# Altium PCB HVBoard.PcbDoc
Units mil, origin at the board's own origin, x right, y up, seen from the top; angles counter-clockwise.
Board outline 6265 x 3705 mil, 2 copper layers (Top Layer, Bottom Layer); 128 components, 91 nets, 394 pads, 13 vias.
Unrouted connection lines stored in the file: 237.
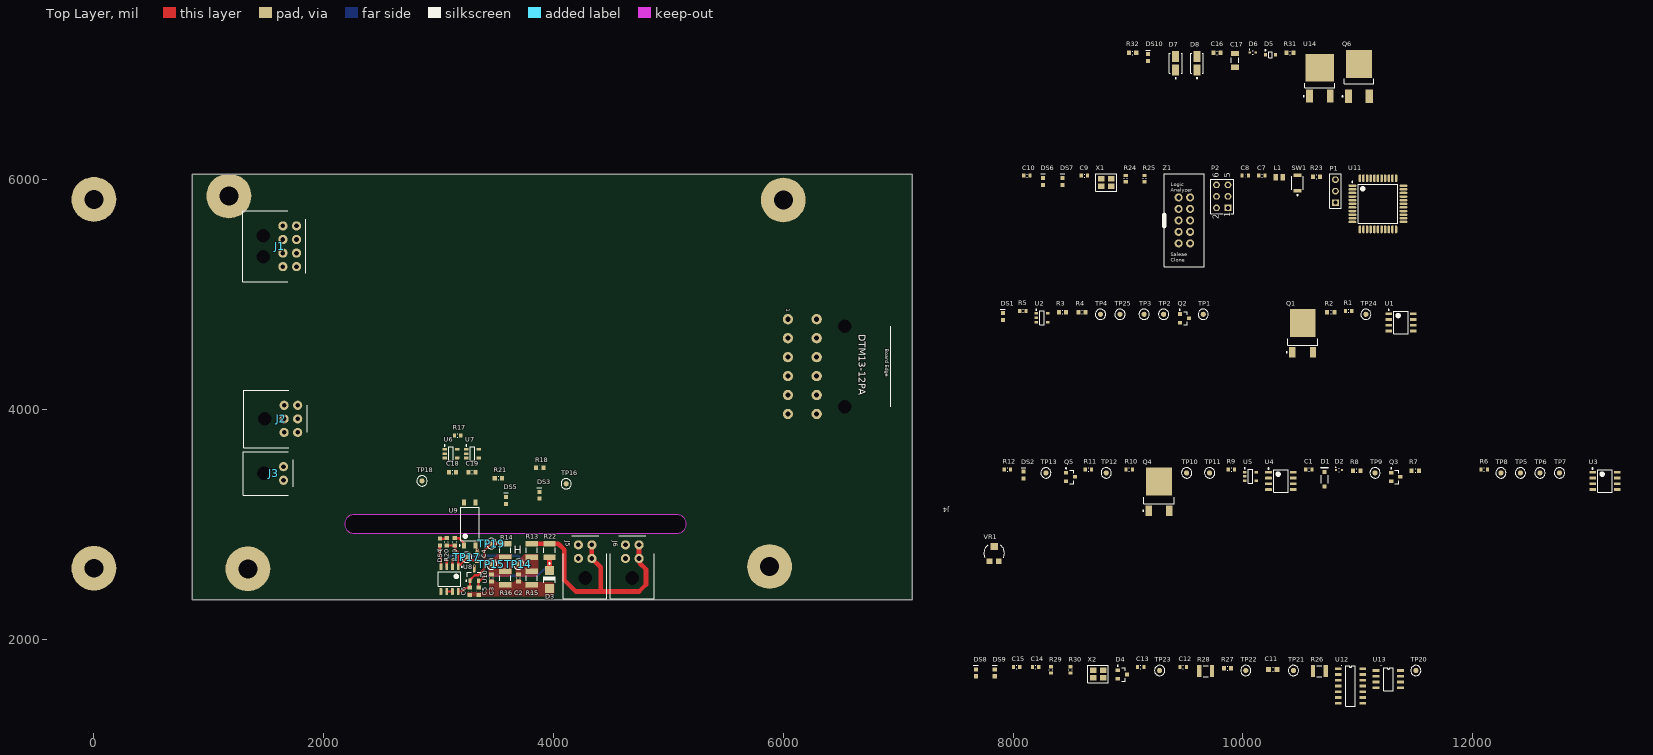
[diagram p0: Top Layer view]
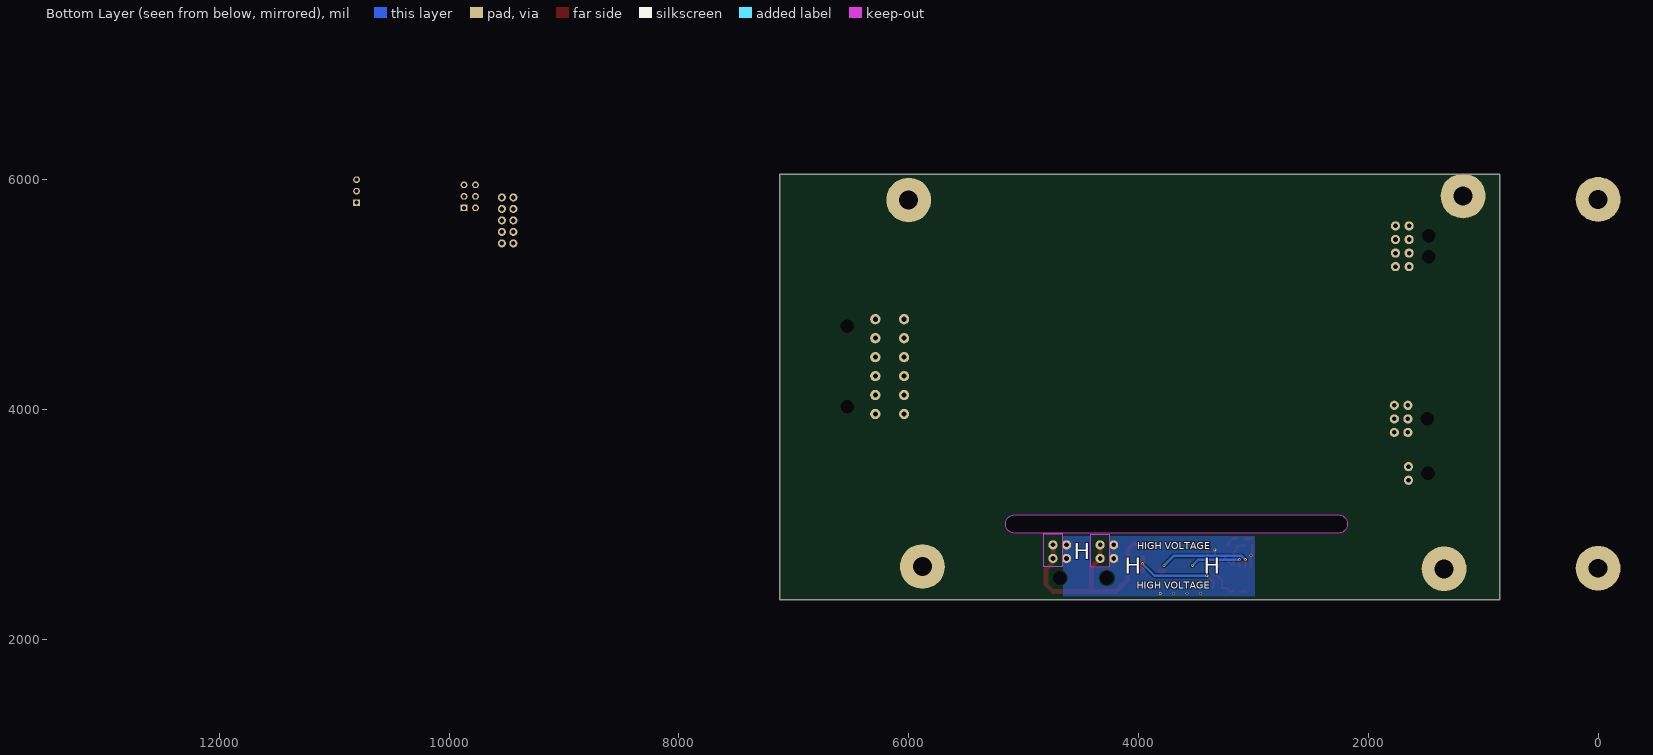
[diagram p1: Bottom Layer view, seen from below]

## Layer stack, top to bottom
Top Solder: solder mask 0.4, Solder Resist, Dk 3.5
Top Layer: signal copper 1.4
Dielectric 1: dielectric 12.6, FR-4, Dk 4.8
Bottom Layer: signal copper 1.4
Bottom Solder: solder mask 0.4, Solder Resist, Dk 3.5

## Board outline
855,2345 855,6050 7120,6050 7120,2345
cut-out: 2261.06,2925 5076.06,2925 ccw(c5076.06,3005) 5076.06,3085 2261.06,3085 ccw(c2261.06,3005)

## Design rules (kind name [scope] priority, off if disabled: settings)
Clearance [All] p1: gap=10 ignorepadtopadclearanceinfootprint=FALSE except(0: Arc-Hole Track-Hole SMDPad-Hole THPad-Hole Via-Hole Fill-Hole Poly-Hole Region-Hole Text-Hole)
PolygonConnect [All] p1: connectstyle=Direct reliefconductorwidth=10 reliefentries=4 polygonreliefangle="90 Angle" airgapwidth=10
RoomDefinition "Power (VCC to 5V)" [InComponentClass('Power (VCC to 5V)')] p1: confinementstyle=ConfineIn formatcopy=TRUE lockcomponents=FALSE outline 8970,6655.04 11155,6655.04 11155,7215.04 8970,7215.04
RoomDefinition Microcontroller [InComponentClass('Microcontroller')] p2: confinementstyle=ConfineIn formatcopy=TRUE lockcomponents=FALSE outline 8065,5231.93 11450,5231.93 11450,6136.93 8065,6136.93
RoomDefinition "Insulation Monitoring Device" [InComponentClass('Insulation Monitoring Device')] p3: confinementstyle=ConfineIn formatcopy=TRUE lockcomponents=FALSE outline 7875,4240 11530,4240 11530,4960 7875,4960
RoomDefinition "Current Sensor (LEM)" [InComponentClass('Current Sensor (LEM)')] p4: confinementstyle=ConfineIn formatcopy=TRUE lockcomponents=FALSE outline 7895,3050 13305,3050 13305,3580 7895,3580
RoomDefinition CANBUS [InComponentClass('CANBUS')] p5: confinementstyle=ConfineIn formatcopy=TRUE lockcomponents=FALSE outline 7640,1410 11620,1410 11620,1860 7640,1860
RoutingVias [All] p1: holewidth=15 width=25 viastyle="Through Hole" minholewidth=15 minwidth=25 maxholewidth=15 maxwidth=25
SolderMaskExpansion [All] p1: expansion=4
Width [All] p1: maxlimit=40 minlimit=10 preferedwidth=20 minimp=50.000000 maximp=50.000000 favimp=50.000000
30 further rules are at their usual default settings.

## Classes and differential pairs
component class "Tractive System Active Light Driving Circuity (TSAL)": C2 C3 C4 C5 C6 C18 C19 D3 DS3 DS4 DS5 R13 R14 R15 R16 R17 R18 R19 R20 R21 R22 TP14 TP15 TP16 TP17 TP18 TP19 U6 U7 U8 U9 U10
component class "Power (VCC to 5V)": C16 C17 D5 D6 D7 D8 DS10 Q6 R31 R32 U14
component class Microcontroller: C7 C8 C9 C10 DS6 DS7 L1 P1 P2 R23 R24 R25 SW1 U11 X1 Z1
component class "Insulation Monitoring Device": DS1 J1 Q1 Q2 R1 R2 R3 R4 R5 TP1 TP2 TP3 TP4 TP24 TP25 U1 U2
component class "Current Sensor (LEM)": C1 D1 D2 DS2 J2 J3 Q3 Q4 Q5 R6 R7 R8 R9 R10 R11 R12 TP5 TP6 TP7 TP8 TP9 TP10 TP11 TP12 TP13 U3 U4 U5 VR1
component class Connector: J4 J5 J6
component class CANBUS: C11 C12 C13 C14 C15 D4 DS8 DS9 R26 R27 R28 R29 R30 TP20 TP21 TP22 TP23 U12 U13 X2

## Components (designator, comment, footprint, x,y, rotation, side; value= is the part's Value field where it differs from the comment)
C1 "CAP 100nF 50V" CAPC0603(1608)100_L 10575,3480 r0 top value=100nF
C2 "CAP 100nF 50V" CAPC0603(1608)100_N 3695,2535 r270 top value=100nF
C3 "CAP 100nF 50V" CAPC0603(1608)100_N 3460,2535 r270 top value=100nF
C4 "CAP 100nF 50V" CAPC0603(1608)100_N 3335,2715.94 r90 top value=100nF
C5 "CAP 100nF 50V" CAPC0603(1608)100_N 3347.4,2420 r270 top value=100nF
C6 "CAP 100nF 50V" CAPC0603(1608)100_N 3272.6,2420 r270 top value=100nF
C7 "CAP 100nF 50V 0603(1608)" CAPC0603(1608)100_L 10165,6036.93 r0 top value=100nF
C8 "CAP 100nF 50V 0603(1608)" CAPC0603(1608)100_L 10020,6036.93 r0 top value=100nF
C9 "CAP 18pF 50V 0603(1608)" CAPC0603(1608)100_L 8620,6036.93 r0 top value=18pF
C10 "CAP 18pF 50V 0603(1608)" CAPC0603(1608)100_L 8120,6036.93 r0 top value=18pF
C11 "CAP 4.7nF 50V 0603(1608)" CAPC0603(1608)100_M 10260,1740 r0 top value=4.7nF
C12 "CAP 100nF 50V 0603(1608)" CAPC0603(1608)100_L 9480,1760 r0 top value=100nF
C13 "CAP 100nF 50V 0603(1608)" CAPC0603(1608)100_L 9110,1760 r0 top value=100nF
C14 "CAP 18pF 50V 0603(1608)" CAPC0603(1608)100_L 8195,1760 r0 top value=18pF
C15 "CAP 18pF 50V 0603(1608)" CAPC0603(1608)100_L 8030,1760 r0 top value=18pF
C16 "CAP 100nF 50V 0603(1608)" CAPC0603(1608)100_N 9775,7105.04 r0 top value=100nF
C17 "CAP 10uF 50V 1206(3216)" CAPC1206(3216)190_N 9930,7040.04 r90 top value=10uF
C18 "CAP 100nF 50V" CAPC0603(1608)100_N 3119.92,3457.4 r0 top value=100nF
C19 "CAP 100nF 50V" CAPC0603(1608)100_N 3289.92,3457.4 r0 top value=100nF
D1 "BZT52C5V1-7-F" DIOD-SOD123_V 10710,3395 r90 top
D2 "ESD5Z5.0T1G" ONSC-SOD-523-2-502-01_V 10835,3475 r0 top
D3 "18V Zener SMA" ONSC-SMA-2-403D-02_F_V 3965,2521.71 r270 top
D4 "NUP2105LT1G" ONSC-SOT-23-3-318-08_V 8950,1695 r0 top
D5 "MM3Z10VT1G" ONSC-SOD-323-2-477-02_V 10240,7090.04 r0 top
D6 "ESD5Z5.0T1G" ONSC-SOD-523-2-502-01_V 10085,7110.04 r0 top
D7 "SMAJ18CA-E3/61" VISH-DO-214AC-2_N 9415,7015.04 r90 top
D8 "SMAJ18CA-E3/61" VISH-DO-214AC-2_N 9600,7015.04 r90 top
DS1 "LED Red 0603" "LED RED 0603" 7910,4810 r90 top
DS2 "LED Red 0603" "LED RED 0603" 8090,3430 r90 top
DS3 "LED Red 0603" "LED RED 0603" 3875.94,3255 r90 top
DS4 "LED Red 0603" "LED RED 0603" 3010,2850 r270 top
DS5 "LED Red 0603" "LED RED 0603" 3585,3210 r90 top
DS6 "LED Orange 0603" "LED ORANGE 0603" 8260,5986.93 r90 top
DS7 "LED Orange 0603" "LED ORANGE 0603" 8430,5986.93 r90 top
DS8 "LED Blue 0603" "LED BLUE 0603" 7675,1710 r90 top
DS9 "LED Blue 0603" "LED BLUE 0603" 7840,1710 r90 top
DS10 "LED Green 0603" "LED GREEN 0603" 9175,7065.04 r90 top
J1 "Microfit 3.0 2x4" Microfit_2X4_R_TH 1475,5422.17 r270 top
J2 "Microfit 3.0 2x3" Microfit_2X3_R_TH 1485,3920 r270 top
J3 "Microfit 3.0 1x2" Microfit_1X2_R_TH 1480,3445 r270 top
J4 "DTM12" DTM13-12PA 6535,4375 r270 top
J5 "Microfit 3.0 2x2" Microfit_2X2_R_TH 4275,2535 r0 top
J6 "Microfit 3.0 2x2" Microfit_2X2_R_TH 4685,2535 r0 top
L1 "LQM21FN100M70L" MURA-IND0805_L 10315,6021.93 r0 top
P1 "Header 3" HDR1X3 10805,5801.93 r90 top
P2 "Header 3X2" HDR2X3 9870,5756.93 r90 top
Q1 "SUD50P06-15-GE3" VSIL-TO-252AA-3_V 10520,4665 r90 top
Q2 "NVR5198NLT1G" ONSC-SOT-23-3-318-08_V 9490,4795 r0 top
Q3 "NVR5198NLT1G" ONSC-SOT-23-3-318-08_V 11330,3415 r0 top
Q4 "SUD50P06-15-GE3" VSIL-TO-252AA-3_V 9270,3285 r90 top
Q5 "NVR5198NLT1G" ONSC-SOT-23-3-318-08_V 8500,3415 r0 top
Q6 "STD35P6LLF6" ONSC-DPAK-3-369C-01_V 11010,6900.04 r90 top
R1 "1K 5% 0603(1608)" RESC0603(1608)_L 10920,4860 r0 top value="1000.00 Ohm"
R2 "2K2 5% 0603(1608)" RESC0603(1608)_N 10765,4850 r0 top value="2200.00 Ohm"
R3 "2K2 5% 0603(1608)" RESC0603(1608)_N 8430,4850 r0 top value="2200.00 Ohm"
R4 "2K2 5% 0603(1608)" RESC0603(1608)_N 8600,4850 r0 top value="2200.00 Ohm"
R5 "1K 5% 0603(1608)" RESC0603(1608)_L 8085,4860 r0 top value="1000.00 Ohm"
R6 "1K 5% 0603(1608)" RESC0603(1608)_L 12100,3480 r0 top value="1000.00 Ohm"
R7 "10K 5% 0603(1608)" RESC0603(1608)_N 11500,3470 r0 top value="10000.00 Ohm"
R8 "4K7 5% 0603(1608)" RESC0603(1608)_N 10990,3470 r0 top value="4700.00 Ohm"
R9 "1K 5% 0603(1608)" RESC0603(1608)_L 9900,3480 r0 top value="1000.00 Ohm"
R10 "1K 5% 0603(1608)" RESC0603(1608)_L 9010,3480 r0 top value="1000.00 Ohm"
R11 "DNP" RESC0603(1608)_L 8655,3480 r0 top
R12 "DNP" RESC0603(1608)_L 7950,3480 r0 top
R13 "9K1 5% 1210(3225)" RESC1210(3225)_N 3810,2775 r90 top value="9100.00 Ohm"
R14 "1K 5% 1210(3225)" RESC1210(3225)_N 3580,2775 r90 top value="1000.00 Ohm"
R15 "1K 5% 1210(3225)" RESC1210(3225)_N 3810,2535 r90 top value="1000.00 Ohm"
R16 "1K 5% 1210(3225)" RESC1210(3225)_N 3580,2535 r90 top value="1000.00 Ohm"
R17 "1K 5% 0603(1608)" RESC0603(1608)_L 3165,3775 r0 top value="1000.00 Ohm"
R18 "1K 5% 0603(1608)" RESC0603(1608)_N 3880,3495 r0 top value="1000.00 Ohm"
R19 "2K2 5% 0603(1608)" RESC0603(1608)_N 3140,2850 r270 top value="2200.00 Ohm"
R20 "1K 5% 0603(1608)" RESC0603(1608)_N 3070,2850 r270 top value="1000.00 Ohm"
R21 "1K 5% 0603(1608)" RESC0603(1608)_N 3520,3405 r0 top value="1000.00 Ohm"
R22 "1K 5% 1210(3225)" RESC1210(3225)_N 3965,2775 r90 top value="1000.00 Ohm"
R23 "10K 5% 0603(1608)" RESC0603(1608)_N 10640,6026.93 r0 top value="10000.00 Ohm"
R24 "1K 5% 0603(1608)" RESC0603(1608)_L 8980,6011.93 r90 top value="1000.00 Ohm"
R25 "1K 5% 0603(1608)" RESC0603(1608)_L 9145,6011.93 r90 top value="1000.00 Ohm"
R26 "60R4 1% 1210(3225)" RESC1210(3225)_L 10665,1725 r0 top value="60.40 Ohm"
R27 "300R 5% 0603(1608)" RESC0603(1608)_N 9865,1750 r0 top value="300.00 Ohm"
R28 "60R4 1% 1210(3225)" RESC1210(3225)_L 9675,1725 r0 top value="60.40 Ohm"
R29 "1K 5% 0603(1608)" RESC0603(1608)_L 8330,1735 r90 top value="1000.00 Ohm"
R30 "1K 5% 0603(1608)" RESC0603(1608)_L 8500,1735 r90 top value="1000.00 Ohm"
R31 "1K 5% 0603(1608)" RESC0603(1608)_N 10410,7105.04 r0 top value="1000.00 Ohm"
R32 "100K 5% 0603(1608)" RESC0603(1608)_N 9040,7105.04 r0 top value="100000.00 Ohm"
SW1 "B3U-1000P" OMRON-B3U-1000_V 10475,5971.93 r90 top
TP1 "TestPoint_SMD" TestPointSMD 9655,4830 r0 top
TP2 "TestPoint_SMD" TestPointSMD 9310,4830 r0 top
TP3 "TestPoint_SMD" TestPointSMD 9140,4830 r0 top
TP4 "TestPoint_SMD" TestPointSMD 8760,4830 r0 top
TP5 "TestPoint_SMD" TestPointSMD 12415,3450 r0 top
TP6 "TestPoint_SMD" TestPointSMD 12585,3450 r0 top
TP7 "TestPoint_SMD" TestPointSMD 12755,3450 r0 top
TP8 "TestPoint_SMD" TestPointSMD 12245,3450 r0 top
TP9 "TestPoint_SMD" TestPointSMD 11150,3450 r0 top
TP10 "TestPoint_SMD" TestPointSMD 9510,3450 r0 top
TP11 "TestPoint_SMD" TestPointSMD 9710,3450 r0 top
TP12 "TestPoint_SMD" TestPointSMD 8810,3450 r0 top
TP13 "TestPoint_SMD" TestPointSMD 8285,3450 r0 top
TP14 "TestPoint_SMD" TestPointSMD 3695,2655 r270 top
TP15 "TestPoint_SMD" TestPointSMD 3460,2655 r0 top
TP16 "TestPoint_SMD" TestPointSMD 4110,3355 r0 top
TP17 "TestPoint_SMD" TestPointSMD 3245,2715.94 r0 top
TP18 "TestPoint_SMD" TestPointSMD 2855,3380 r0 top
TP19 "TestPoint_SMD" TestPointSMD 3460,2835 r0 top
TP20 "TestPoint_SMD" TestPointSMD 11505,1730 r0 top
TP21 "TestPoint_SMD" TestPointSMD 10440,1730 r0 top
TP22 "TestPoint_SMD" TestPointSMD 10025,1730 r0 top
TP23 "TestPoint_SMD" TestPointSMD 9275,1730 r0 top
TP24 "TestPoint_SMD" TestPointSMD 11070,4830 r0 top
TP25 "TestPoint_SMD" TestPointSMD 8930,4830 r0 top
U1 "LM358AM" D0008A_N 11375,4760 r0 top
U2 "SN74LVC1G17DBVR" DBV0005A_L 8250,4800 r0 top
U3 "LM358AM" D0008A_N 13150,3380 r0 top
U4 "LM358AM" D0008A_N 10330,3380 r0 top
U5 "SN74LVC1G17DBVR" DBV0005A_L 10065,3420 r0 top
U6 "SN74LVC1G17DBVR" DBV0005A_N 3105.87,3617.4 r0 top
U7 "SN74LVC1G17DBVR" DBV0005A_N 3295.87,3617.4 r0 top
U8 "LM358AM" D0008A_N 3095,2525 r270 top
U9 "TCLT1000" VISH-SOP4L-4_V 3272.6,3005 r90 top
U10 "LM3480IM3-12" DBZ0003A_N 3310,2557.56 r90 top
U11 "ATmega1284P-AU" 44A_N 11175,5791.93 r0 top
U12 "MCP2518FD" "MCP2517FD SOIC" 10830,1745 r0 top
U13 "MCP2561" "MCP2561 SOIC" 11160,1730 r0 top
U14 "L78M05CDT" STM-TO252-3_A_V 10670,6885.04 r90 top
VR1 "4.7k Variable Resistor" VG039NCHXTB472 7835,2750 r0 top
X1 "XTAL_16Mz_3.2mm*2.5mm" 3.2mm*2.5mm 8810,5976.93 r0 top
X2 "XTAL_20Mz_3.2mm*2.5mm" 3.2mm*2.5mm 8740,1700 r0 top
Z1 "LogicAnalyzerBreakOut" LogicAnalyzer 9490,5646.93 r0 top

## Footprints (in the part's own frame and the unit in brackets; to place one, negate y for a bottom-side part, rotate by r counter-clockwise, add the part's x,y. Pads: shape width x height; smd on the part's side, far side on the other; paste and mask are expansions set on the pad)
3.2mm*2.5mm [mm]
  rect 1.4x1.2 smd: 1(-1.1,-0.85) 2(1.1,-0.85) 3(1.1,0.85) 4(-1.1,0.85)
  silkscreen extent -2.29,-1.91 2.29,1.91, body extent -1.6,-1.25 1.6,1.25, height 0.8
44A_N [mm] "Thin QFP, 44-Leads, Body 10x10mm, Pitch 0.8mm, IPC Medium Density"
  oval 1.75x0.55 smd: 1(-5.65,4) 2(-5.65,3.2) 3(-5.65,2.4) 4(-5.65,1.6) 5(-5.65,0.8) 6(-5.65,0) 7(-5.65,-0.8) 8(-5.65,-1.6) 9(-5.65,-2.4) 10(-5.65,-3.2) 11(-5.65,-4) 23(5.65,-4) 24(5.65,-3.2) 25(5.65,-2.4) 26(5.65,-1.6) 27(5.65,-0.8) 28(5.65,0) 29(5.65,0.8) 30(5.65,1.6) 31(5.65,2.4) 32(5.65,3.2) 33(5.65,4)
  oval 0.55x1.75 smd: 12(-4,-5.65) 13(-3.2,-5.65) 14(-2.4,-5.65) 15(-1.6,-5.65) 16(-0.8,-5.65) 17(0,-5.65) 18(0.8,-5.65) 19(1.6,-5.65) 20(2.4,-5.65) 21(3.2,-5.65) 22(4,-5.65) 34(4,5.65) 35(3.2,5.65) 36(2.4,5.65) 37(1.6,5.65) 38(0.8,5.65) 39(0,5.65) 40(-0.8,5.65) 41(-1.6,5.65) 42(-2.4,5.65) 43(-3.2,5.65) 44(-4,5.65)
  silkscreen extent -5.77,-4.35 4.35,4.95, body extent -5,-5 5,5, height 1.2
CAPC0603(1608)100_L [mm] "Chip Capacitor, Body 1.6x0.8mm, Height 1.0mm, IPC High Density"
  rect 0.7x0.9 smd: 1(-0.7,0) 2(0.7,0)
  silkscreen extent -0.05,-0.35 0.05,0.35, body extent -0.87,-0.47 0.88,0.48, height 1
CAPC0603(1608)100_M [mm] "Chip Capacitor, Body 1.6x0.8mm, Height 1.0mm, IPC Low Density"
  rect 1.1x1.1 smd: 1(-0.9,0) 2(0.9,0)
  silkscreen extent -0.05,-0.45 0.05,0.45, body extent -0.87,-0.47 0.88,0.48, height 1
CAPC0603(1608)100_N [mm] "Chip Capacitor, Body 1.6x0.8mm, Height 1.0mm, IPC Medium Density"
  rect 0.9x1 smd: 1(-0.8,0) 2(0.8,0)
  silkscreen extent -0.05,-0.4 0.05,0.4, body extent -0.87,-0.48 0.88,0.47, height 1
CAPC1206(3216)190_N [mm] "Chip Capacitor, Body 3.2x1.6mm, Height 1.9mm, IPC Medium Density"
  rect 1.15x1.8 smd: 1(-1.5,0) 2(1.5,0)
  silkscreen extent -0.55,-0.8 0.55,0.8, body extent -1.7,-0.9 1.7,0.9, height 1.9
D0008A_N [mm] "SOIC, 8-Leads, Body 5x4mm, Pitch 1.27mm, IPC Medium Density"
  rrect17% 1.45x0.6 smd: 1(-2.725,1.905) 2(-2.725,0.635) 3(-2.725,-0.635) 4(-2.725,-1.905) 5(2.725,-1.905) 6(2.725,-0.635) 7(2.725,0.635) 8(2.725,1.905)
  silkscreen extent -2.85,-2.5 1.6,2.88, body extent -3,-2.45 3,2.45, height 1.63
DBV0005A_L [mm] "SOT23, 5-Leads, Body 3.05x1.75mm, Pitch 0.95mm, IPC High Density"
  rrect18% 0.8x0.55 smd: 1(-1.275,0.95) 2(-1.275,0) 3(-1.275,-0.95) 4(1.275,-0.95) 5(1.275,0.95)
  silkscreen extent -1.4,-1.55 0.5,1.9, body extent -1.42,-1.46 1.42,1.46, height 1.08
DBV0005A_N [mm] "SOT23, 5-Leads, Body 3.05x1.75mm, Pitch 0.95mm, IPC Medium Density"
  rrect17% 1x0.6 smd: 1(-1.375,0.95) 2(-1.375,0) 3(-1.375,-0.95) 4(1.375,-0.95) 5(1.375,0.95)
  silkscreen extent -1.5,-1.55 0.5,1.92, body extent -1.42,-1.46 1.42,1.46, height 1.08
DBZ0003A_N [mm] "SOT23, 3-Leads, Body 3.04x1.4mm, Pitch 0.95mm, IPC Medium Density"
  rrect17% 1x0.6 smd: 1(-1.2,0.95) 2(-1.2,-0.95) 3(1.2,0)
  silkscreen extent -1.32,-1.5 0.7,1.92, body extent -1.26,-1.46 1.26,1.46, height 0.96
DIOD-SOD123_V [mm] "SMD, 2-Leads, Body 2.7x1.55mm"
  rect 0.9x0.95 smd: 1(-1.575,0) 2(1.575,0)
  silkscreen extent -0.86,-0.77 2.52,0.77, body extent -1.35,-0.77 1.35,0.77, height 1.41
DTM13-12PA [mil]
  round 90 hole 45: 1(412.5,-495) 2(247.5,-495) 3(82.5,-495) 4(-82.5,-495) 5(-247.5,-495) 6(-412.5,-495) 7(-412.5,-245) 8(-247.5,-245) 9(-82.5,-245) 10(82.5,-245) 11(247.5,-245) 12(412.5,-245)
  round 0 hole 118.11 mask+39.37: NC(-350,0) NC(350,0)
  silkscreen extent -350,400 350,400, body extent -1200,-590 1200,914, height 1350
HDR1X3 [mm] "Connector; Header; 3 Position"
  rect 1.5x1.5 hole 0.9: 1(0,0)
  round 1.5 hole 0.9: 2(2.54,0) 3(5.08,0)
  silkscreen extent -1.27,-1.27 6.35,1.27
HDR2X3 [mm] "Connector; Header; 3x2 Position"
  rect 1.5x1.5 hole 0.9: 1(0,0)
  round 1.5 hole 0.9: 2(0,2.54) 3(2.54,0) 4(2.54,2.54) 5(5.08,0) 6(5.08,2.54)
  silkscreen extent -1.27,-1.27 6.35,3.81
"LED BLUE 0603" [mil]
  rect 35x35 smd: 1(-30,0) 2(30,0)
  silkscreen extent 65,-20 65,20, body extent -40,-20 40,20, height 30
"LED GREEN 0603" [mil]
  rect 35x35 smd: 1(-30,0) 2(30,0)
  silkscreen extent 65,-20 65,20, body extent -40,-20 40,20, height 30
"LED ORANGE 0603" [mil]
  rect 35x35 smd: 1(-30,0) 2(30,0)
  silkscreen extent 65,-20 65,20, body extent -40,-20 40,20, height 30
"LED RED 0603" [mil]
  rect 35x35 smd: 1(-30,0) 2(30,0)
  silkscreen extent 65,-20 65,20, body extent -40,-20 40,20, height 30
LogicAnalyzer [mil]
  round 70 hole 40: 1(-50,200) 2(50,200) 3(-50,100) 4(50,100) 5(-50,0) 6(50,0) 7(-50,-100) 8(50,-100) 9(-50,-200) 10(50,-200)
  silkscreen extent -175,-405 175,405, body extent -175,-404 175,404, height 359
"MCP2517FD SOIC" [mm]
  rect 1.5x0.6 smd: 1(0,0) 2(0,-1.27) 3(0,-2.54) 4(0,-3.81) 5(0,-5.08) 6(0,-6.35) 7(0,-7.62) 8(5.4,-7.62) 9(5.4,-6.35) 10(5.4,-5.08) 11(5.4,-3.81) 12(5.4,-2.54) 13(5.4,-1.27) 14(5.4,0)
  silkscreen extent 0.64,-8.25 3.76,0.76, body extent 0.74,-8.13 4.64,0.52, height 1.74
"MCP2561 SOIC" [mm]
  rect 1.55x0.6 smd: 1(0,0) 2(0,-1.27) 3(0,-2.54) 4(0,-3.81) 5(5.4,-3.81) 6(5.4,-2.54) 7(5.4,-1.27) 8(5.4,0)
  silkscreen extent 1.02,-4.44 3.74,1.14, body extent 0.51,-4.38 4.64,0.52, height 1.65
Microfit_1X2_R_TH [mil]
  round 80 hole 40: 1(59.06,170) 2(-59.06,170)
  round 0 hole 118.11 unplated mask+10: NC(0,0)
  silkscreen extent -190,-180 190,255, body extent -190,-180 190,210, height 223
Microfit_2X2_R_TH [mil]
  round 80 hole 40: 1(59.06,170) 2(-59.06,170) 3(59.06,288.19) 4(-59.06,288.19)
  round 0 hole 118.11 unplated mask+10: NC(0,0)
  silkscreen extent -190,-180 190,370, body extent -200,-180 200,302, height 350
Microfit_2X3_R_TH [mil]
  round 80 hole 40: 1(118.11,170) 2(0,170) 3(-118.11,170) 4(118.11,288.19) 5(0,288.19) 6(-118.11,288.19)
  round 0 hole 118.11 unplated mask+10: NC(0,0)
  silkscreen extent -250,-180 250,370, body extent -259,-180 259,302, height 350
Microfit_2X4_R_TH [mil]
  round 80 hole 40: 1(177.17,170) 2(59.06,170) 3(-59.06,170) 4(-177.17,170) 5(177.17,288.19) 6(59.06,288.19) 7(-59.06,288.19) 8(-177.17,288.19)
  round 0 hole 118.11 unplated mask+10: NC(-92.52,0) NC(92.52,0)
  silkscreen extent -310,-180 310,370, body extent -318,-180 318,302, height 350
MURA-IND0805_L [mm] "Chip Inductor, 2-Leads, Body 2.2x1.45mm, IPC High Density"
  rect 0.99x1.39 smd: 1(-0.755,0) 2(0.755,0)
  body extent -1.1,-0.72 1.1,0.72, height 1.45
OMRON-B3U-1000_V [mm] "SMD, 2-Leads, Body 3x2.5mm"
  rect 0.8x1.7 smd: 1(-1.7,0) 2(1.7,0)
  silkscreen extent -2.77,-1.25 1.5,1.25, body extent -1.5,-1.25 1.5,1.25, height 1.75
ONSC-DPAK-3-369C-01_V [mm] "DPAK, 3-Leads, Body 6.54x6.095mm, Pitch 2.29mm"
  rect 3x1.6 smd: 1(-4.4,2.29) 3(-4.4,-2.29)
  rect 6.2x5.8 smd: 4(2.8,0)
  silkscreen extent -4.52,-3.27 -0.45,3.76, body extent -1.6,-3.27 4.49,3.27, height 2.38
ONSC-SMA-2-403D-02_F_V [mm] "Molded, 2-Leads, Body 4.32x2.6mm"
  rect 2x2 smd: 1(-2,0) 2(2,0)
  silkscreen extent -3.67,-1.3 0.74,1.3, body extent -2.16,-1.3 2.16,1.3, height 2.2
ONSC-SOD-323-2-477-02_V [mm] "SOD, 2-Leads, Body 1.7x1.25mm"
  rect 0.63x0.83 smd: 1(-1.115,0) 2(1.115,0)
  silkscreen extent -1.24,-0.67 0.4,1.09, body extent -0.85,-0.63 0.85,0.63, height 1.06
ONSC-SOD-523-2-502-01_V [mm] "SOD, 2-Leads, Body 1.2x0.8mm"
  rect 0.48x0.4 smd: 1(-0.66,0) 2(0.66,0)
  silkscreen extent -0.75,-0.4 0.07,0.65, body extent -0.6,-0.4 0.6,0.4, height 0.7
ONSC-SOT-23-3-318-08_V [mm] "SOT23, 3-Leads, Body 2.92x1.3mm, Pitch 0.95mm"
  rect 0.9x0.8 smd: 1(-1,0.95) 2(-1,-0.95) 3(1,0)
  silkscreen extent -1.12,-1.46 0.65,2.02, body extent -0.65,-1.46 0.65,1.46, height 1.11
RESC0603(1608)_L [mm] "Chip Resistor, Body 1.6x0.8mm, IPC High Density"
  rect 0.7x0.9 smd: 1(-0.7,0) 2(0.7,0)
  silkscreen extent -0.05,-0.35 0.05,0.35, body extent -0.85,-0.47 0.85,0.47, height 0.6
RESC0603(1608)_N [mm] "Chip Resistor, Body 1.6x0.8mm, IPC Medium Density"
  rect 0.9x1 smd: 1(-0.8,0) 2(0.8,0)
  silkscreen extent -0.05,-0.4 0.05,0.4, body extent -0.85,-0.47 0.85,0.47, height 0.6
RESC1210(3225)_L [mm] "Chip Resistor, Body 3.2x2.5mm, IPC High Density"
  rect 0.95x2.6 smd: 1(-1.4,0) 2(1.4,0)
  silkscreen extent -0.55,-1.2 0.55,1.2, body extent -1.7,-1.35 1.7,1.35, height 0.71
RESC1210(3225)_N [mm] "Chip Resistor, Body 3.2x2.5mm, IPC Medium Density"
  rect 1.15x2.7 smd: 1(-1.5,0) 2(1.5,0)
  silkscreen extent -0.55,-1.25 0.55,1.25, body extent -1.7,-1.35 1.7,1.35, height 0.71
STM-TO252-3_A_V [mm] "D-PAK, 3-Leads, Body 6.20x6.60mm, Pitch 2.28mm"
  rect 2.8x1.5 smd: 1(-3.95,2.28) 3(-3.95,-2.28)
  rect 6.1x6.3 smd: 4(2.3,0)
  silkscreen extent -4.07,-3.3 -1.15,3.7, body extent -3.37,-3.3 6.35,3.3, height 2.43
TestPointSMD [mil]
  round 45 smd: 1(0,0)
  silkscreen extent -45,-45 45,45
VG039NCHXTB472 [mil] "VG039NCHXTB472"
  rect 50x50 smd: 1(40,-70) 3(-40,-70)
  rect 65x60 smd: 2(0,60)
  silkscreen extent -90,-38 90,69, body extent -60,-75 60,75, height 50
VISH-DO-214AC-2_N [mm] "DO-214AC, 2-Leads, Body 4.5x2.79mm, IPC Medium Density"
  rect 2.4x1.55 smd: 1(-1.525,0) 2(1.525,0)
  silkscreen extent -3.4,-1.4 2.25,1.4, body extent -2.25,-1.4 2.25,1.39, height 2.29
VISH-SOP4L-4_V [mm] "SOP, 4-Leads, Body 4.1x7.7mm, Pitch 2.54mm"
  rect 1.3x0.9 smd: 1(-4.75,1.27) 2(-4.75,-1.27) 3(4.75,-1.27) 4(4.75,1.27)
  silkscreen extent -4.87,-2.05 3.7,2.39, body extent -5.07,-2.05 5.07,2.05, height 2.3
VSIL-TO-252AA-3_V [mm] "DPAK, 3-Leads, Body 6.73x6.22mm, Pitch 2.28mm"
  rect 2.286x1.397 smd: 1(-4.185,2.28) 3(-4.185,-2.28)
  rect 6.18x5.69 smd: 2(2.25,0)
  silkscreen extent -4.32,-3.35 -1.24,3.65, body extent -2.8,-3.37 3.42,3.37, height 2.38

## Part data
C1 C2 C3 C4 C5 C6 C7 C8 C12 C13 C16 C18 C19: library part CMP-1035-02591-1, "CAP 100nF 50V ±5% 0603 (1608 Metric) Thickness 1mm SMD", Case-EIA=0603, Case-Metric=1608, Rated Voltage="50 V", Tolerance=±5%, Max Thickness="1 mm", Technology=SMT
C9 C10 C14 C15: library part CMP-1035-00748-1, "CAP 18pF 50V ±1% 0603 (1608 Metric) Thickness 1mm SMD", Case-EIA=0603, Case-Metric=1608, Rated Voltage="50 V", Tolerance=±1%, Max Thickness="1 mm", Technology=SMT
C11: library part CMP-1035-02202-1, "CAP 4.7nF 50V ±5% 0603 (1608 Metric) Thickness 1mm SMD", Case-EIA=0603, Case-Metric=1608, Rated Voltage="50 V", Tolerance=±5%, Max Thickness="1 mm", Technology=SMT
C17: library part CMP-1037-04982-1, "CAP 10uF 50V ±10% 1206 (3216 Metric) Thickness 1.9mm SMD", Case-EIA=1206, Case-Metric=3216, Rated Voltage="50 V", Tolerance=±10%, Max Thickness="1.9 mm", Technology=SMT
D1: library part CMP-2000-05976-1, "Surface Mount Zener Diode, 5.1 V, -65 to 150 degC, 2-Pin SMD (SOD-123), RoHS, Tape and Reel", Ir - Reverse Current=2uA, Manufacturer=DiodesIncorporated, Maximum Operating Temperature=+150C, Minimum Operating Temperature=-65C, Package / Case=SOD-123, Package Description="2-Pin Surface Mount Device, Body 2.7 x 1.55 mm", Package Reference=SOD123, Pd - Power Dissipation=500mW, Voltage Temperature Coefficient=-0.75mV/C, Voltage Tolerance=6%, Vz - Zener Voltage=5.1V, Zener Current=5mA, Brand=DiodesIncorporated, Configuration=Single, Datasheet URL=http://www.diodes.com/_files/datasheets/ds18004.pdf, Datasheet Version="Rev. 37-2, 09/2012", Factory Pack Quantity=3000, Height=1.35mm, Length=2.85mm, Manufacturer URL=http://www.diodes.com/, Mounting Style=SMD/SMT, Mounting Technology=SurfaceMount, Packaging=Reel, Product Category=ZenerDiodes, RoHS=True, Series=BZT52C5, Termination Style=SMD/SMT, Unit Weight=0.000353oz, Width=1.7mm, Zz - Zener Impedance=60Ohms
D2 D6: library part CMP-1063-00102-1, "Transient Voltage Suppressor, Micro-Packaged Diode for ESD Protection, 2-Pin SOD-523, Pb-Free, Tape and Reel", Manufacturer="On Semiconductor", ComponentLink1Description="Manufacturer URL", ComponentLink1URL=http://www.onsemi.com/, ComponentLink2Description=Datasheet, ComponentLink2URL=http://www.onsemi.cn/pub_link/Collateral/ESD5Z2.5T1-D.PDF, ComponentLink3Description="Package Specification", ComponentLink3URL=http://www.onsemi.com/pub_link/Collateral/502-01.PDF, DatasheetVersion="Rev. 10", Direction=Unidirectional, IR Max (uA)=0.05, Mounting Technology="Surface Mount", Number of Lines=1, PackageDescription="2-Pin SOD, Body 1.2 x 0.8 mm", PackageReference=SOD-523-2-502-01, PackageVersion="Rev. E, 09/2010", Packing="Tape and Reel", PartNumber=ESD5Z5.0T1G, PPK Max (W)=174, RoHS=Pb-Free, V(BR) Min (V)=6.2, VRWM Max (V)=5
D3: library part CMP-1060-00118-1, "1.5 W Zener Voltage Regulator, 2-Pin SMA, Pb-Free, Tape and Reel", Manufacturer="On Semiconductor", PartNumber=1SMA5931BT3G, ComponentLink1Description="Manufacturer URL", ComponentLink1URL=http://www.onsemi.com/, ComponentLink2Description=Datasheet, ComponentLink2URL=http://www.onsemi.com/pub_link/Collateral/1SMA5913BT3-D.PDF, ComponentLink3Description="Package Specification", ComponentLink3URL=http://www.onsemi.com/pub_link/Collateral/1SMA5913BT3-D.PDF, DatasheetVersion="Rev. 8", Mounting Technology="Surface Mount", PackageDescription="2-Pin Small Molded Package, J-Bend Lead, Body 2.605 x 4.315 mm", PackageReference=SMA-2-403D-02_F, PackageVersion="Rev. F, 11/2008", Packing="Tape and Reel", RoHS=Pb-Free, VZ Typ (V)=18
D4: library part CMP-1063-00164-1, "Dual Line CAN Bus Protector, 3-Pin SOT-23, Pb-Free, Tape and Reel", Manufacturer="On Semiconductor", C Max (pF)=30, ComponentLink1Description="Manufacturer URL", ComponentLink1URL=http://www.onsemi.com/, ComponentLink2Description=Datasheet, ComponentLink2URL=http://www.onsemi.cn/pub_link/Collateral/NUP2105L-D.PDF, ComponentLink3Description="Package Specification", ComponentLink3URL=http://www.onsemi.cn/pub_link/Collateral/318-08.PDF, DatasheetVersion="Rev. 5", Direction=Bidirectional, IR Max (uA)=0.1, Mounting Technology="Surface Mount", Number of Lines=2, PackageDescription="3-Pin Small Outline Transistor, Body 2.92 x 1.3 mm, Pitch 0.95 mm", PackageReference=SOT-23-3-318-08, PackageVersion="Rev. AP, 11/2009", Packing="Tape and Reel", PartNumber=NUP2105LT1G, PPK Max (W)=350, RoHS=Pb-Free, V(BR) Min (V)=26.2
D5: library part CMP-1060-00715-1, "Zener Voltage Regulator, 300 mW, 2-Pin SOD-323, Pb-Free, Tape and Reel", Manufacturer="On Semiconductor", ComponentLink1Description="Manufacturer URL", ComponentLink1URL=http://www.onsemi.com/, ComponentLink2Description=Datasheet, ComponentLink2URL=http://www.onsemi.cn/pub_link/Collateral/MM3Z2V4T1-D.PDF, ComponentLink3Description="Package Specification", ComponentLink3URL=http://www.onsemi.com/pub_link/Collateral/477-02.PDF.1, DatasheetVersion="Rev. 9", Mounting Technology="Surface Mount", PackageDescription="2-Pin SOD, Body 1.7 x 1.25 mm", PackageReference=SOD-323-2-477-02, PackageVersion="Rev. H, 03/2007", Packing="Tape and Reel", PartNumber=MM3Z10VT1G, P Max (W)=0.3, RoHS=Pb-Free, VZ Typ (V)=10
D7 D8: library part CMP-0548-00180-2, "Transient Voltage Suppressor, 6.40 to 231 V, 18 V Stand-off Voltage, Bi-Directional, -55 to 155 degC, 2-pin DO-214AC, Pb-Free, Tape and Reel", Manufacturer="Vishay Semiconductor", Operating Junction and Storage Temperature Range="-55 to 150 degC", ComponentLink1Description="Manufacturer URL", ComponentLink1URL=http://www.vishay.com/, ComponentLink2Description=Datasheet, ComponentLink2URL=http://www.vishay.com/docs/88390/smaj50a.pdf, ComponentLink3Description="Package Specification", ComponentLink3URL=http://www.vishay.com/docs/88390/smaj50a.pdf, DatasheetVersion=12/8/2013, ID (uA)=2, IFSM="40 A", Mounting Technology="Surface Mount", PackageDescription="2-Pin DO-214AC (SMA), Body 4.245 x 2.665 mm", PackageReference=DO-214AC-2, Packing="Tape and Reel", PartNumber=SMAJ18CA-E3/61, PPPM (W)="400, 300", RoHS=TRUE, VBR Bi-Directional (V)="6.4 to 231", VWM (V)=18
DS1 DS2 DS3 DS4 DS5: library part "LED RED 0603"
DS6 DS7: library part "LED ORANGE 0603"
DS8 DS9: library part "LED BLUE 0603"
DS10: library part "LED GREEN 0603"
J1: library part Microfit_2x4
J2: library part Microfit_2x3
J3: library part Microfit_1x2
J5 J6: library part Microfit_2x2
L1: library part CMP-2000-06587-1, "Fixed Inductor, 10 uH, +/-20%, -55 to 125 degC, 2-Pin SMD (0805), RoHS, Tape and Reel", Case Size/Dimension=0805, DC Resistance=0.6, Inductance-Nom=10H, Manufacturer=Murata, Package Description="2-Pin Surface Mount Device, Body 2 x 1.25 mm", Package Reference=IND0805, Rated Current-Max=100mA, Tolerance (%)=20%, Datasheet URL=http://psearch.en.murata.com/inductor/product/LQM21FN100M70%23.pdf, Datasheet Version=05/2016, Manufacturer URL=http://www.murata.com/, Mounting Technology=SurfaceMount
P1: "Header, 3-Pin", LatestRevisionDate=17-Jul-2002, LatestRevisionNote="Re-released for DXP Platform.", Publisher="Altium Limited"
P2: "Header, 3-Pin, Dual row", LatestRevisionDate=17-Jul-2002, LatestRevisionNote="Re-released for DXP Platform.", Publisher="Altium Limited"
Q1 Q4: library part CMP-2000-05431-1, "P-Channel (D-S) MOSFET, 30 V, -55 to 150 degC, 3-Pin TO-252, RoHS, Tape and Reel", Id - Continuous Drain Current=50A, Manufacturer=Vishay, Maximum Operating Temperature=+150C, Minimum Operating Temperature=-55C, Package / Case=TO-252AA-3, Package Description="3-Pin Surface Mount Device, Body 6.54 x 6.095 mm, Pitch 2.28 mm", Package Reference=TO-252, Pd - Power Dissipation=2.5W, Rds On - Drain-Source Resistance=15mOhms, Vds - Drain-Source Breakdown Voltage=-60V, Vgs - Gate-Source Voltage=20V, Brand=VishaySemiconductors, Channel Mode=Enhancement, Configuration=Single, Datasheet URL=https://datasheet.ciiva.com/4444/sud50p06-244530-4444327.pdf, Datasheet Version="Rev. C, 07/2013", Factory Pack Quantity=2000, Fall Time=175ns, Height=2.39mm, Length=6.73mm, Manufacturer URL=http://www.vishay.com/, Mounting Style=SMD/SMT, Number of Channels=1Channel, Package URL=http://www.vishay.com/docs/89975/v15wl45c-m3.pdf, Packaging=Reel, Product Category=MOSFET, Rise Time=70ns, RoHS=True, Series=SUD, Technology=Si, Tradename=TrenchFET, Transistor Polarity=P-Channel, Transistor Type=1P-Channel, Typical Turn-Off Delay Time=175ns, Typical Turn-On Delay Time=15ns, Unit Weight=0.050717oz, Width=6.22mm
Q2 Q3 Q5: library part CMP-1058-00774-1, "Power MOSFET, 60 V, 155 mOhm, Single N-Channel Logic Level, 3-Pin SOT-23, Pb-Free, Tape and Reel", Manufacturer="On Semiconductor", Package Type=SOT-23-3, Channel Polarity="N Channel", Ciss Typ (pF)=182, ComponentLink1Description="Manufacturer URL", ComponentLink1URL=http://www.onsemi.com/, ComponentLink2Description=Datasheet, ComponentLink2URL=http://www.onsemi.com/pub_link/Collateral/NVR5198NL-D.PDF, ComponentLink3Description="Package Specification", ComponentLink3URL=http://www.onsemi.cn/pub_link/Collateral/318-08.PDF, Configuration=Single, Coss Typ (pF)=25, Crss Typ (pF)=16, DatasheetVersion="Rev. 1", ID Max (A)=2.2, Mounting Technology="Surface Mount", PackageDescription="3-Pin Small Outline Transistor, Body 2.92 x 1.3 mm, Pitch 0.95 mm", PackageReference=SOT-23-3-318-08, PackageVersion="Rev. AP, 11/2009", Packing="Tape and Reel", PartNumber=NVR5198NLT1G, Qrr Typ (nC)=6, RoHS=Pb-Free, V(BR)DSS Min (V)=60, VGS(th) Max (V)=2.5, VGS Max (V)=20
Q6: library part CMP-1058-00390-1, "Power MOSFET, -60 V, -12 A, P-Channel, 3-Pin DPAK, Pb-Free, Tape and Reel", Manufacturer="On Semiconductor", Package Type="DPAK-3, IPAK-4", PartNumber=NTD2955T4G, Channel Polarity="P Channel", Ciss Typ (pF)=500, ComponentLink1Description="Manufacturer URL", ComponentLink1URL=http://www.onsemi.com/, ComponentLink2Description=Datasheet, ComponentLink2URL=http://www.onsemi.cn/pub_link/Collateral/NTD2955-D.PDF, ComponentLink3Description="Package Specification", ComponentLink3URL=http://www.onsemi.cn/pub_link/Collateral/369C.PDF, Configuration=Single, Coss Typ (pF)=150, Crss Typ (pF)=50, DatasheetVersion="Rev. 13", ID Max (A)=12, Mounting Technology="Surface Mount", PackageDescription="3-Pin Flange Mount, Body 6.54 x 6.095 mm, Pitch 2.29 mm", PackageReference=DPAK-3-369C-01, PackageVersion="Rev. E, 02/2014", Packing="Tape and Reel", PD Max (W)=55, Qrr Typ (nC)=100, RoHS=Pb-Free, V(BR)DSS Min (V)=60, VGS(th) Max (V)=4, VGS Max (V)=20
R1 R5 R6 R9 R10 R17 R18 R20 R21 R24 R25 R29 R30 R31: library part CMP-1012-00074-1, "1K 0.1W 5% 0603 (1608 Metric)  SMD", Case-EIA=0603, Case-Metric=1608, Power="0.1 W", Tolerance="5 %", Technology=SMT
R2 R3 R4 R19: library part CMP-1012-00082-1, "2K2 0.1W 5% 0603 (1608 Metric)  SMD", Case-EIA=0603, Case-Metric=1608, Power="0.1 W", Tolerance="5 %", Technology=SMT
R7 R23: library part CMP-1012-00098-1, "10K 0.1W 5% 0603 (1608 Metric)  SMD", Case-EIA=0603, Case-Metric=1608, Power="0.1 W", Tolerance="5 %", Technology=SMT
R8: library part CMP-1012-00090-1, "4K7 0.1W 5% 0603 (1608 Metric)  SMD", Case-EIA=0603, Case-Metric=1608, Power="0.1 W", Tolerance="5 %", Technology=SMT
R11 R12: library part CMP-1591-00001-1, "0603 (1608 Metric) Chip Resistor", Case-EIA=0603, Case-Metric=1608, PackageReference=RESC0603(1608)
R13: library part CMP-1015-00097-1, "9K1 0.5W 5% 1210 (3225 Metric)  SMD", Case-EIA=1210, Case-Metric=3225, Power="0.5 W", Tolerance="5 %", Technology=SMT
R14 R15 R16 R22: library part CMP-1015-00074-1, "1K 0.5W 5% 1210 (3225 Metric)  SMD", Case-EIA=1210, Case-Metric=3225, Power="0.5 W", Tolerance="5 %", Technology=SMT
R26 R28: library part CMP-1015-00372-1, "60R4 0.5W 1% 1210 (3225 Metric)  SMD", Case-EIA=1210, Case-Metric=3225, Power="0.5 W", Tolerance="1 %", Technology=SMT
R27: library part CMP-1012-00061-1, "300R 0.1W 5% 0603 (1608 Metric)  SMD", Case-EIA=0603, Case-Metric=1608, Power="0.1 W", Tolerance="5 %", Technology=SMT
R32: library part CMP-1012-00122-1, "100K 0.1W 5% 0603 (1608 Metric)  SMD", Case-EIA=0603, Case-Metric=1608, Power="0.1 W", Tolerance="5 %", Technology=SMT
SW1: library part CMP-2100-03586-1, "Ultra-Small Tactile Switch, 0.05 A, 12 V, -25 to 70 degC, 2-Pin SMD, RoHS, Tape and Reel", Case/Package=SMD/SMT, Contact Current Rating=50mA, Insulation Resistance=100MOhm, Manufacturer="Omron Electronic Components", Max Operating Temperature=70degC, Min Operating Temperature=-25degC, Operating Force=1.5N, Package Description="2-Pin Surface Mount Device, Body 3 x 2.5 mm", Package Quantity=1, Package Reference=B3U-1000, Voltage Rating (DC)=12V, Actuator Length=0.4mm, Contact Material=Silver, Current Rating=50mA, Datasheet URL=http://www.omron.com/ecb/products/pdf/en-b3u.pdf, Datasheet Version=42005.0, Depth=2.5mm, Electrical Life=200000Cycles, Height=1.2mm, Illumination Type=Illuminated, Lead Free=LeadFree, Length=4mm, Manufacturer URL=http://www.omron.com/, Max Current Rating=50mA, Mount=SurfaceMount, Orientation=Straight, Packaging=TapeandReel, REACH SVHC=Unknown, RoHSCompliant=true, Switch Travel=0.15mm, Termination=SMD/SMT, Throw Configuration=SPST, Weight=0.022g, Width=3mm
U1 U3 U4 U8: library part CMP-0055-00796-3, "Low Power Dual Operational Amplifier, 8-pin Narrow SOIC", Manufacturer="Texas Instruments", Package Reference=D0008A, PackageTopMarking=NSZXTT*LM*358AM, PowerWise=N, Code_IPC=SOIC127P600-8, Code_JEDEC=MS-012-AA, ComponentLink1Description="Datasheet URL", ComponentLink1URL=http://www.ti.com/general/docs/lit/getliterature.tsp?genericPartNumber=LM358-N&fileType=pdf, CompType=Amplifiers, PackageDescription="SOIC Narrow, 4.9 x 3.9 x 1.45mm, 8 Lead, 1.27mm Pitch", PinCount=8, RoHS=N
U2 U5 U6 U7: library part CMP-0859-00033-4, "Single Schmitt-Trigger Buffer, DBV0005A, LARGE T&R", F @ Nom Voltage(Max)(Mhz)=150, Generic Part Number=SN74LVC1G17, ICC @ Nom Voltage(Max)(mA)=0.01, Manufacturer="Texas Instruments", Operating Temperature Range(C)="-40 to 125,-40 to 85", Rating=Catalog, tpd @ Nom Voltage(Max)(ns)=11,6.5,5.5,5, Voltage(Nom)(V)=1.8,2.5,3.3,5, 3-State Output=No, Bits(#)=1, DatasheetVersion=SCES351V, Input Type=CMOS/TTL, Logic=True, Output Drive (IOL/IOH)(Max)(mA)=32/-32, Output Type=CMOS, PackageReference=DBV0005A, Schmitt Trigger=Yes, Sub-Family="Non-Inverting Buffer/Driver", Technology Family=LVC, VCC(Max)(V)=5.5, VCC(Min)(V)=1.65
U9: library part CMP-2000-07234-1, "Optocoupler, Phototransistor Output, VCEO 70 V, -55 to 100 degC, 4-Pin SOP (SOP4L), RoHS, Tape and Reel", Manufacturer=Vishay/Semiconductor, Maximum Collector Current=50mA, Maximum Collector Emitter Saturation Voltage=300mV, Maximum Collector Emitter Voltage=70V, Maximum Current Transfer Ratio @ Current=600%, Maximum Forward Voltage=1.6V, Maximum Input Current=60mA, Maximum Power Dissipation=250mW, Maximum Reverse Voltage=6V, Minimum Isolation Voltage=5000Vrms, Operating Temperature=-40to100°C, Package=4SOP, Package Description="4-Pin Small Outline Package Integrated Circuit, Body 4.1 x 7.5 mm, Pitch 2.54 mm", Package Reference=SOP4L, Typical Forward Voltage=1.25V, Category=TransistorandPhotovoltaicOutputPhotoCouplers, Datasheet URL=http://www.vishay.com/docs/83515/tclt1000.pdf, Datasheet Version="Rev. 2.9, 12/2015", Input Type=DC, Manufacturer URL=http://www.vishay.com/, Mounting Technology=SurfaceMount, Number of Channels per Chip=1, Output Type=DC, Packaging=Tape&Reel
U10: library part CMP-0062-02197-3, "100 mA, Quasi Low-Dropout Linear Voltage Regulator, 3-pin SOT-23, Pb-Free", Manufacturer="Texas Instruments", PackageTopMarking=L0C*XTT, PowerWise=N, ComponentLink1Description="Datasheet URL", ComponentLink1URL=http://www.ti.com/general/docs/lit/getliterature.tsp?genericPartNumber=LM3480&fileType=pdf, CompType="LDO IC", PackageDescription="Molded SOT-23, .115 x .051 x .037in Body, 3 Lead, .075 in Pitch", PackageReference=DBZ0003A, PinCount=3, RoHS=Y
U11: library part CMP-0095-00577-1, "8-bit AVR Microcontroller, 128KB Flash, 4KB EEPROM, 16KB SRAM, 44-pin TQFP, Industrial Grade (-40°C to 85°C)", Code_JEDEC=MS-026-ACB, ComponentLink1Description="Manufacturer URL", ComponentLink1URL=http://www.atmel.com/, ComponentLink2Description="ATmega164A/164PA/324A/324PA/644A/644PA/1284/1284P Datasheet", ComponentLink2URL=http://www.atmel.com/dyn/resources/prod_documents/doc8272.pdf, ComponentLink3Description="ATmega164A/164PA/324A/324PA/644A/644PA/1284/1284P Summary", ComponentLink3URL=http://www.atmel.com/dyn/resources/prod_documents/8272S.pdf, DatasheetVersion="revC, Jun-2011", PackageDescription="44-Pin Plastic Thin Profile Quad Flat Pack, 10 x 10 x 1.0 mm Body, 0.8 mm Pitch (TQFP)", PackageReference=44A, PackageVersion="revC, Oct-2010"
U14: library part CMP-2000-06530-1, "Precision Regulator, 0.5 A, 5 V Output, 0 to 150 degC, 3-Pin DPAK (TO252), RoHS, Tube", Input Voltage Max=35V, Input Voltage Min=10V, Linear Regulator Case Style=TO-252, Manufacturer=STMicroelectronics, Operating Temperature Max=150°C, Operating Temperature Min=0°C, Output Current=500mA, Output Voltage Nom.=5V, Package Description="3-Pin Transistor Outline, Body 6.5 x 6.1 mm, Pitch 2.28 mm", Package Reference=TO252, Datasheet URL=http://www.st.com/content/ccc/resource/technical/document/datasheet/d7/5f/dc/5c/d5/b6/48/7c/CD00000447.pdf/files/CD00000447.pdf/jcr:content/translations/en.CD00000447.pdf, Datasheet Version="Rev. 20, 06/2014", Manufacturer URL=http://www.st.com/, Mounting Technology=SurfaceMount, No. of Pins=3Pins, Packaging=Each, SVHC=NoSVHC(17-Dec-2015)
VR1: "4k7 ±25% ±250 ppm/°C SMD Variable Resistors RoHS", ComponentLink1Description=LCSC, ComponentLink1URL=https://lcsc.com/product-detail/Variable-Resistors_HDK-Hokuriku-Elec-Industry-VG039NCHXTB472_C128555.html
Z1: library part LogicAnalyer
X1: ComponentLink1Description=LCSC, ComponentLink1URL=https://lcsc.com/product-detail/SMD-Crystal-Resonators_Yangxing-Tech-X322516MOB4SI_C12668.html
X2: ComponentLink1Description=LCSC, ComponentLink1URL=https://lcsc.com/product-detail/SMD-Crystal-Resonators_Yangxing-Tech-X322520MSB4SI_C9004.html

## Free pads (board coordinates)
  round 390 hole 165: M4(0,2620) M4(0,5830) M4(1175,5860) M4(1340,2615) M4(5880,2635) M4(6000,5825)

## Via types
v1: diameter 25, hole 15, Top Layer to Bottom Layer, tented both sides, 13 vias

## Nets (pads, with @x,y where several pads share a name; then routed paths per layer and width w, separated by ;. In a path a pad name is that pad's centre, name@x,y a point inside that pad or via, vN(x,y) a via of type N, cw(c..) or ccw(c..) an arc to the next point about the centre after c; other vN are vias at no path point)
+5: C12.2 C13.2 C17.2 C18.1 C19.1 D6.1 J2.4 P2.2 R11.2 R17.2 R23.2 R29.2 R30.2 R31.2 U1.8 U2.5 U3.8 U4.8 U5.5 U6.5 U7.5 U11.17 U11.38 U12.14 U13.3 U14.3 VR1.1
+12: C16.2 D5.1 D8.2 J1.2 J2.3 J4.1 Q1.3 Q4.3 Q6.3 R1.2 R2.2 R9.2 U14.1
+12_ISO: C6.1 R14.2 TP19.1 U8.8 U10.1 | length 722.2
  Top Layer w20: U8.8@3170,2430 3180,2420 3205,2420 3232.56,2447.56 3272.6,2447.56 U10.1 3272.6,2518.19 3314.41,2560 3345,2560 3400,2615 3400,2777.44 3456.61,2834.06 R14.2
+18_ISO: C5.1 D3.1 R22.1 U10.2 | length 857.8
  Top Layer w20: C5.1@3347.4,2447.56 U10.2 3360.32,2510.32 v1(3405,2555)
  Top Layer w40: D3.1 v1(3965,2660) R22.1
  Bottom Layer w20: v1(3405,2555) 3860,2555 v1(3965,2660)
CAN_CS: U11.43 U12.13 Z1.4
CAN_CTRL_CLKO: U12.3
CAN_INT: U11.40 U12.4 Z1.5
CAN_INT0: U11.42 U12.9
CAN_INT1: U11.41 U12.8 Z1.6
CAN_N: D4.1 J4.10 R28.1 TP23.1 U13.6
CAN_P: D4.2 J4.3 R26.2 TP20.1 U13.7
CAN_RX: DS9.2 TP22.1 U12.2 U13.4 Z1.8
CAN_RX_LED: DS9.1 R30.1
CAN_SPLIT: C11.2 R26.1 R27.2 R28.2
CAN_SPLIT_R: R27.1 U13.5
CAN_TX: DS8.2 TP21.1 U12.1 U13.1 Z1.7
CAN_TX_LED: DS8.1 R29.1
CAN_X1_20MHz: C14.2 U12.6 X2.1
CAN_X2_20MHz: C15.2 U12.5 X2.3
GND: C1.2 C7.2 C8.2 C9.1 C10.1 C11.1 C12.1 C13.1 C14.1 C15.1 C16.1 C17.1 C18.2 C19.2 D1.1 D2.2 D4.3 D6.2 D7.1 D8.1 DS1.2 DS2.2 DS3.2 DS5.2 DS6.2 DS7.2 DS10.2 J1.1 J1.3 J2.5 J4.12 P1.1 P2.6 Q2.2 Q3.2 Q5.2 R3.1 R4.1 R6.1 R8.1 R12.1 R32.1 SW1.1 U1.4 U2.3 U3.4 U4.4 U5.3 U6.3 U7.3 U9.3 U11.6 U11.18 U11.28 U11.39 U12.7 U13.2 U13.8 U14.4 VR1.3 X1.2 X1.4 X2.2 X2.4 Z1.10
GND_ALT: J1.4 J4.11
HV: J5.1 J5.3 J6.1 J6.3 R13.2 R22.2 | length 2154.6
  Top Layer w40: R13.2 R22.2 4040.94,2834.06 4095,2780 4095,2515 4192.28,2417.72 4410,2417.72 ; J5.3 J5.1 4410,2629.06 4410,2417.72 ; J6.3 J6.1 4751.71,2697.35 4751.71,2663.29 4805,2610 4805,2478.66 4744.06,2417.72 4410,2417.72
HV_GND: C2.2 C3.2 C4.2 C5.2 C6.2 D3.2 DS4.2 J5.2 J5.4 J6.2 J6.4 R15.1 R16.1 U8.4 U9.2 U10.3 | length 278.6
  Top Layer w20: DS4.2 v1@3010,2730 ; U8.4 3020,2720 v1@3010,2730 ; v1(3020,2730) v1@3010,2730 ; U10.3 v1(3310,2640) ; C4.2@3335,2743.5 v1(3335,2780) v1@3335,2785
  other v1: 3460,2400 3577.5,2400 3695,2400 3810,2400
HV_ISO_ACTIVE: C4.1 R19.2 R20.2 TP17.1 U8.1 | length 459.1
  Top Layer w20: R20.2@3070,2822.44 3073.94,2822.44 3077.87,2818.5 R19.2 3144.07,2814.44 3144.07,2782.74 3171.81,2755 3171.81,2650.83 3188.54,2650.83 3240.22,2702.5 3240.22,2711.16 TP17.1 3272.56,2688.39 C4.1@3335,2688.39
HV_REF_ACTIVE: C3.1 R14.1 R16.2 TP15.1 U8.2 | length 493.4
  Top Layer w20: U8.2 v1(3120,2695)
  Bottom Layer w20: v1(3120,2695) 3480,2695 v1(3530,2645)
HV_SPLIT: C2.1 R13.1 R15.2 TP14.1 U8.3 | length 851.4
  Top Layer w20: U8.3 v1(3070,2695)
  Top Layer w40: R15.2@3776.85,2596.69 3779.49,2594.06 R15.2
  Bottom Layer w20: v1(3070,2695) 3102.5,2727.5 3694.35,2727.5 v1(3776.85,2645)
IMD_MEASUREMENT: TP24.1 U1.1 U1.2 U11.14 U11.37
IMD_MEASUREMENT_12V: J1.5 R4.2 TP1.1 U1.3
IMD_MEASUREMENT_LOW: J1.6 R2.1 TP2.1
IMD_STATUS: Q2.1 TP25.1 U1.6 U1.7 U2.2 U11.13 U11.34
IMD_STATUS_12V: J1.8 R3.2 TP4.1 U1.5
LEM_BUFFERED: TP6.1 U3.1 U3.2 U4.3 U11.36
LEM_BUFFERED_REF: TP7.1 U3.6 U3.7 U11.35
LEM_MEASUREMENT: J2.2 R6.2 TP8.1 U3.3
LEM_RESISTOR: J3.2 Q3.3
LEM_SIM: R11.1 R12.2 TP12.1 U4.2 VR1.2
LEM_SIM_N: J2.6 J3.1
LEM_VREF: J2.1 TP5.1 U3.5
MCU_AREF: U11.29
MCU_AVCC: C8.1 L1.1 U11.27
MCU_CLK: P2.3 U11.3 U12.10 Z1.3
MCU_LED_A: R24.2 U11.15
MCU_LED_A_LED: DS6.1 R24.1
MCU_LED_B: R25.2 U11.16
MCU_LED_B_LED: DS7.1 R25.1
MCU_MISO: P2.1 U11.2 U12.12 Z1.2
MCU_MOSI: P2.4 U11.1 U12.11 Z1.1
MCU_PA6: U11.31
MCU_PA7: U11.30
MCU_PB4: U11.44
MCU_PC0: U11.19
MCU_PC1: U11.20
MCU_PC2: U11.21
MCU_PC3: U11.22
MCU_PC4: U11.23
MCU_PC5: U11.24
MCU_PC6: U11.25
MCU_PC7: U11.26
MCU_PD2: U11.11
MCU_PD3: U11.12
MCU_RESET: C7.1 P2.5 R23.1 SW1.2 U11.4
MCU_UART_RX: P1.3 U11.9
MCU_UART_TX: P1.2 U11.10
MCU_XTAL_1: C9.2 U11.8 X1.1
MCU_XTAL_2: C10.2 U11.7 X1.3
NetC1_1: C1.1 D1.2 D2.1 Q3.1 R7.1 R8.2 TP9.1
NetDS1_1: DS1.1 R5.1
NetDS2_1: DS2.1 R10.1
NetDS3_1: DS3.1 R18.1
NetDS4_1: DS4.1 R20.1 | length 61
  Top Layer w20: DS4.1 3012.44,2877.56 R20.1@3070,2877.56
NetDS5_1: DS5.1 R21.1
NetJ4_2: J4.2 R7.2
NetJ4_4: J4.4 Q1.2 TP3.1
NetJ4_5: J4.5
NetJ4_8: J4.8
NetJ4_9: J4.9 Q4.2 TP13.1
NetL1_2: L1.2 U11.5
NetQ1_1: Q1.1 Q2.3 R1.1
NetQ4_1: Q4.1 Q5.3 R9.1
NetQ5_1: Q5.1 TP11.1 U5.4
NetR5_2: R5.2 U2.4
NetR10_2: R10.2 TP10.1 U4.1 U5.2 U11.32
NetR19_1: R19.1 U9.1 | length 120.3
  Top Layer w20: R19.1 3141.5,2880 3180,2880 3214.88,2845.12 3214.88,2825.71 U9.1
NetU4_6: U4.6 U4.7
NetU8_6: U8.6 U8.7 | length 50
  Top Layer w20: U8.6 U8.7
PWR_ONLED: DS10.1 R31.1
PWR_PLRTY: D5.2 Q6.1 R32.2
TSAL_ACTIVE: R18.2 TP16.1 U6.4 U7.2 U11.33
TSAL_INACTIVE: R21.2 U7.4
TSAL_SIG: R17.1 TP18.1 U6.2 U9.4
VCC: D7.2 Q6.4
pads on no net: J1.7 J1.NC J2.NC J3.NC J4.6 J4.7 J4.NC J5.NC J6.NC U2.1 U4.5 U5.1 U6.1 U7.1 U8.5 Z1.9

## Polygon pours and split planes (outlines as drawn)
HV_REF_ACTIVE on Top Layer "Top Layer-HV_REF_ACTIVE" (solid, pour order 8): 3635,2740 3510,2740 3435,2665 3435,2545 3610,2545 3635,2570
HV_SPLIT on Top Layer "Top Layer-HV_SPLIT" (solid, pour order 6): 3745,2740 3670,2665 3670,2545 3840,2545 3865,2570 3865,2740
no net on Top Layer "Top Layer-No Net" (solid, pour order 4): 3755,2740
HV_GND on Top Layer "Top Layer-HV_GND" (solid, pour order 2): 4005,2485 3990,2500 3735,2500 3710,2525 3680,2525 3655,2500 3500,2500 3475,2525 3445,2525 3440,2520 3440,2450 3400,2410 3255,2410 3250,2405 3250,2380 3255,2375 3980,2375 4005,2400
HV_GND on Bottom Layer "Bottom Layer-HV_GND" (solid, pour order 0): 4655,2900 4655,2375 2990,2375 2990,2900

## Keep-outs
Bottom Layer:
  rectangle: 4664.8,2635 4824.42,2920
  rectangle: 4254.8,2630 4415,2915

## Silkscreen, mask and mechanical layers (free items; w line width, h text height)
Top Overlay:
  text "H" at 3655,2720 h120
Bottom Overlay:
  text "HIGH VOLTAGE" at 4010,2785 h60
  text "H" at 4565,2650 h240
  text "H" at 3430,2525 h240
  text "H" at 4120,2525 h240
  text "HIGH VOLTAGE" at 4015,2440 h60
BoardOutline:
  lines w10: 855,2345 855,6050 7120,6050 7120,2345 5123.46,2345 855,2345 ; 2261.06,2925 cw(c2261.06,3005) 2261.06,3085 5076.06,3085 cw(c5076.06,3005) 5076.06,2925 2261.06,2925

## Text inside footprints (layer, text, board x,y; h text height)
J4: Top Overlay "Board Edge" at 6885,4530 h32 r270; Top Overlay "DTM13-12PA" at 6655,4655 h60 r270; Top Overlay "1" at 6025,4880 h32 r270
P2: Top Overlay "6" at 9790,6016.93 h50 r90; Top Overlay "5" at 9890,6016.93 h50 r90; Top Overlay "2" at 9790,5656.93 h50 r90; Top Overlay "1" at 9890,5676.93 h50 r90
Z1: Top Overlay "Logic / Analyzer" at 9370,5896.93 h32; Top Overlay "Saleae / Clone" at 9370,5286.93 h32